# Altium PCB Keyboard.PcbDoc
Units mm, origin at the board's own origin, x right, y up, seen from the top; angles counter-clockwise.
Board outline 90.25 x 20.32 mm, 2 copper layers (Top Layer, Bottom Layer); 9 components, 36 nets, 32 pads, 0 vias.
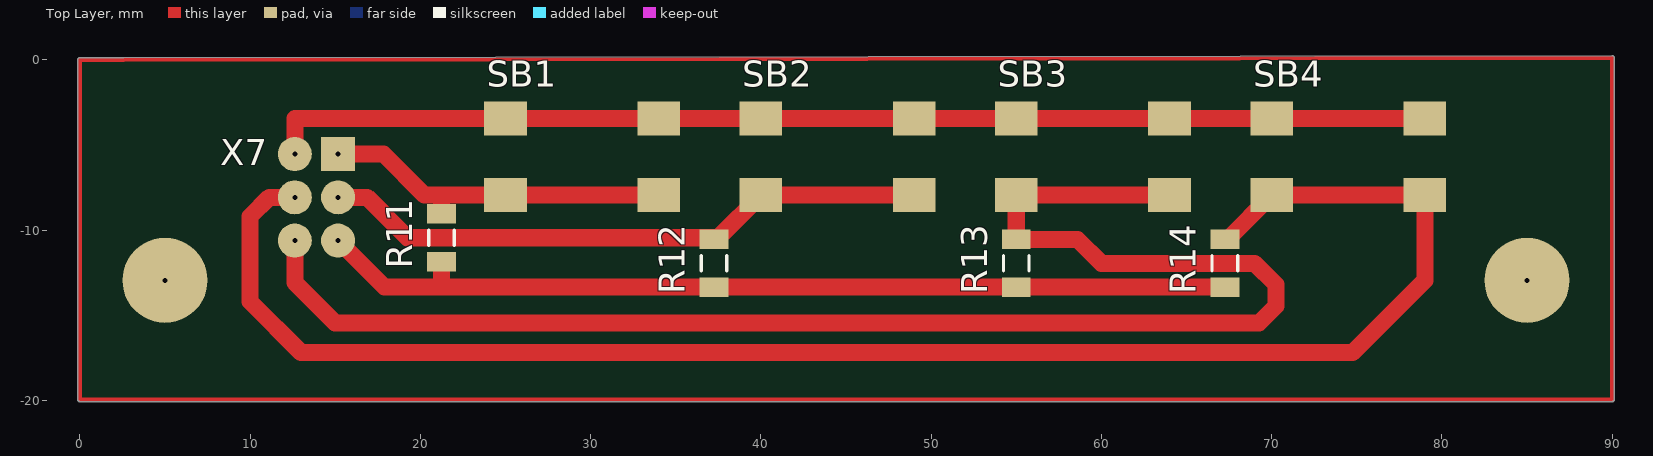
[diagram p0: Top Layer view]
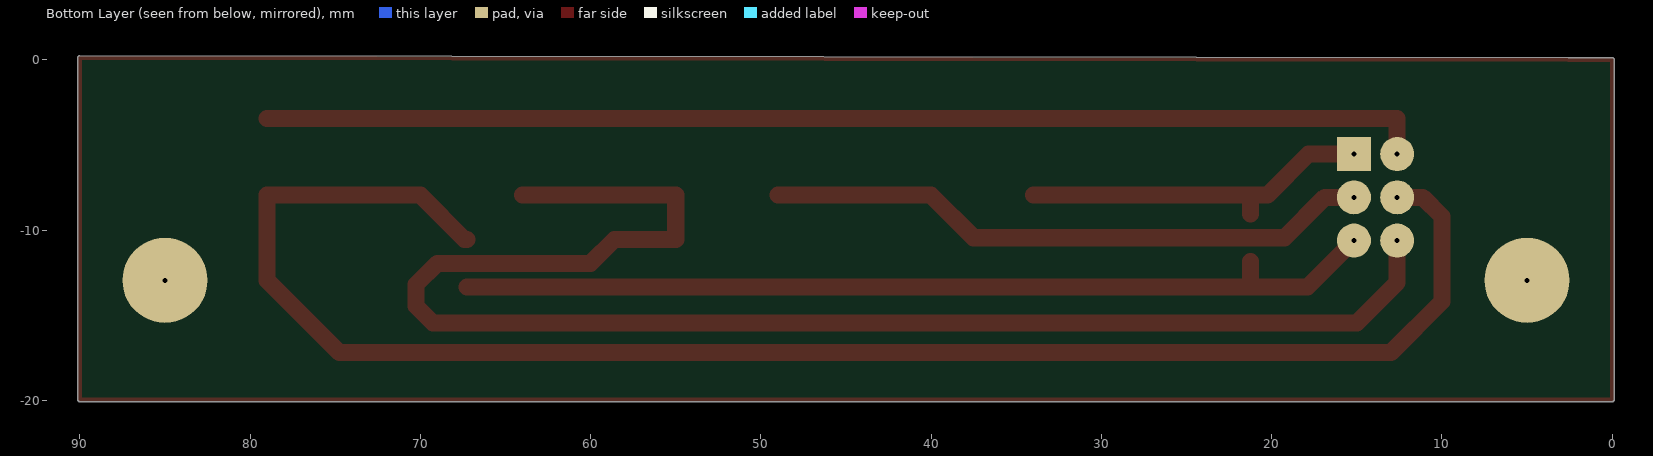
[diagram p1: Bottom Layer view, seen from below]

## Layer stack, top to bottom
Top Solder: solder mask 0.0102, Solder Resist, Dk 3.5
Top Layer: signal copper 0.0356
Dielectric 1: dielectric 0.32, FR-4, Dk 4.8
Bottom Layer: signal copper 0.0356
Bottom Solder: solder mask 0.0102, Solder Resist, Dk 3.5

## Board outline
0,-20.071 cw(c0,-19.943) -0.127,-19.943 -0.127,0 cw(c0,0) 0,0.127 2.57,0.127 90,0.25 cw(c90,0.122) 90.127,0.122 90.127,-19.943 cw(c90,-19.943) 90,-20.071

## Design rules (kind name [scope] priority, off if disabled: settings)
Clearance [All] p1: gap=0.254
PolygonConnect [All] p1: connectstyle=Relief reliefconductorwidth=0.254 reliefentries=4 polygonreliefangle="90 Angle" airgapwidth=0.254
RoutingVias [All] p1: holewidth=0.711 width=1.27 viastyle="Through Hole" minholewidth=0.711 minwidth=1.27 maxholewidth=0.711 maxwidth=1.27
SolderMaskExpansion [All] p1: expansion=0.102
Width [All] p1: maxlimit=1 minlimit=0.254 preferedwidth=1
30 further rules are at their usual default settings.

## Components (designator, comment, footprint, x,y, rotation, side; value= is the part's Value field where it differs from the comment)
R11 "Resistor (0.05W)" "Resistor SMD 1206" 21.25,-10.443 r90 top
R12 "Resistor (0.05W)" "Resistor SMD 1206" 37.25,-11.943 r90 top
R13 "Resistor (0.05W)" "Resistor SMD 1206" 55,-11.943 r90 top
R14 "Resistor (0.05W)" "Resistor SMD 1206" 67.25,-11.943 r90 top
SB1 "Button" "BUTTON SMD" 25,-7.943 r90 top
SB2 "Button" "BUTTON SMD" 40,-7.943 r90 top
SB3 "Button" "BUTTON SMD" 55,-7.943 r90 top
SB4 "Button" "BUTTON SMD" 70,-7.943 r90 top
X7 "KBD_Connector" KBD_Connector 15.165,-5.528 r270 top

## Footprints (in the part's own frame and the unit in brackets; to place one, negate y for a bottom-side part, rotate by r counter-clockwise, add the part's x,y. Pads: shape width x height; smd on the part's side, far side on the other; paste and mask are expansions set on the pad)
"BUTTON SMD" [mm]
  rect 2x2.5 smd: 1(0,0) 2(4.5,0) 3(0,-9) 4(4.5,-9)
  body extent -0.72,-9.45 5.28,0.55, height 5.15
KBD_Connector [mm]
  rect 2x2 hole 0.3 unplated: 1(0,0)
  round 2 hole 0.3 unplated: 2(2.54,0) 3(5.08,0) 4(0,-2.54) 5(2.54,-2.54) 6(5.08,-2.54)
  body extent -1.27,-3.81 6.35,1.27, height 7.99
"Resistor SMD 1206" [mm] "Chip Resistor, 2-Leads, Body 3,10x1,55mm, IPC Medium Density"
  rect 1.15x1.7 smd: 1(-1.4,0) 2(1.4,0)
  silkscreen extent -0.45,-0.75 0.45,0.75, body extent -1.63,-0.85 1.63,0.85, height 0.65

## Free pads (board coordinates)
  round 5 hole 0.3 unplated: 2(85,-12.943) 3(5,-12.943)

## Nets (pads, with @x,y where several pads share a name; then routed paths per layer and width w, separated by ;. In a path a pad name is that pad's centre, name@x,y a point inside that pad or via, vN(x,y) a via of type N, cw(c..) or ccw(c..) an arc to the next point about the centre after c; other vN are vias at no path point)
+5V: 
GND: SB1.2 SB1.4 SB2.2 SB2.4 SB3.2 SB3.4 SB4.2 SB4.4 X7.4 | length 68.5
  Top Layer w1: X7.4 12.625,-3.443 SB1.2 SB1.4 SB2.2 SB2.4 SB3.2 SB3.4 SB4.2 SB4.4
NetC1_2: 
NetC2_2: 
NetC4_2: 
NetD2_2: 
NetDD1_3: 
NetDD1_4: 
NetDD1_5: 
NetDD1_6: 
NetDD1_9: 
NetDD1_10: 
NetDD1_11: 
NetDD1_12: 
NetDD1_13: 
NetDD1_14: 
NetDD1_15: 
NetDD1_16: 
NetDD1_18: 
NetDD1_19: 
NetDD1_20: 
NetJP1_1: 
NetR2_1: 
NetR3_1: 
NetR5_2: 
NetR6_1: 
NetR7_1: 
NetR8_1: 
NetR9_1: 
NetR11_2: R11.2 SB1.1 SB1.3 X7.1 | length 20.9
  Top Layer w1: X7.1 17.835,-5.528 20.25,-7.943 21.25,-7.943 ; R11.2 21.25,-7.943 ; SB1.3 SB1.1 21.25,-7.943
NetR12_2: R12.2 SB2.1 SB2.3 X7.2 | length 35.9
  Top Layer w1: X7.2 16.875,-8.068 19.25,-10.443 37.5,-10.443 SB2.1 SB2.3
NetR13_2: R13.2 SB3.1 SB3.3 X7.6 | length 90.7
  Top Layer w1: X7.6 12.625,-13.068 15,-15.443 69.25,-15.443 70.25,-14.443 70.25,-13.193 69,-11.943 60,-11.943 58.6,-10.543 R13.2 SB3.1 SB3.3
NetR14_2: R14.2 SB4.1 SB4.3 X7.5 | length 97.9
  Top Layer w1: X7.5 11.125,-8.068 10,-9.193 10,-14.193 13,-17.193 74.75,-17.193 79,-12.943 SB4.3 SB4.1 67.4,-10.543 R14.2
NetV1_3: 
NetV1_4: 
VDD: R11.1 R12.1 R13.1 R14.1 X7.3 | length 54.7
  Top Layer w1: X7.3 17.9,-13.343 21.25,-13.343 ; R11.1 21.25,-13.343 ; R14.1 R13.1 R12.1 21.25,-13.343
copper on no net: | length 220
  Top Layer w0.254: 0,-19.943 0,-2 0,0 2.57,0 90,0.122 90,-1.943 90,-19.943 0,-19.943